# Altium PCB PCB1 (1).PcbDoc
Units mil, origin at the board's own origin, x right, y up, seen from the top; angles counter-clockwise.
Board outline 2720 x 1275 mil, 2 copper layers (Top Layer, Bottom Layer 1); 17 components, 10 nets, 71 pads, 6 vias.
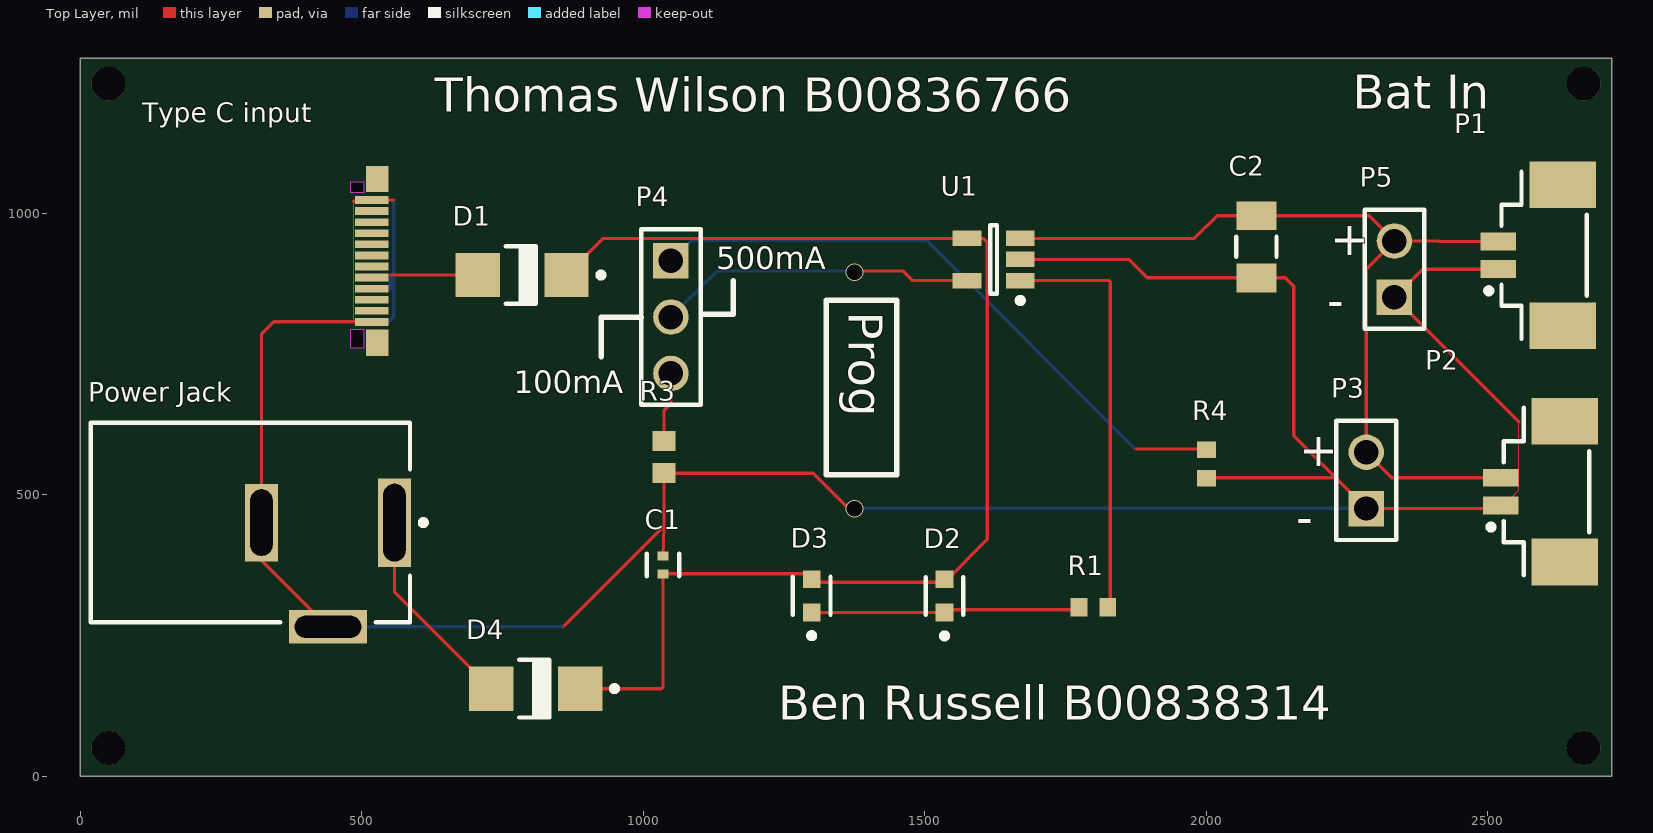
[diagram p0: Top Layer view]
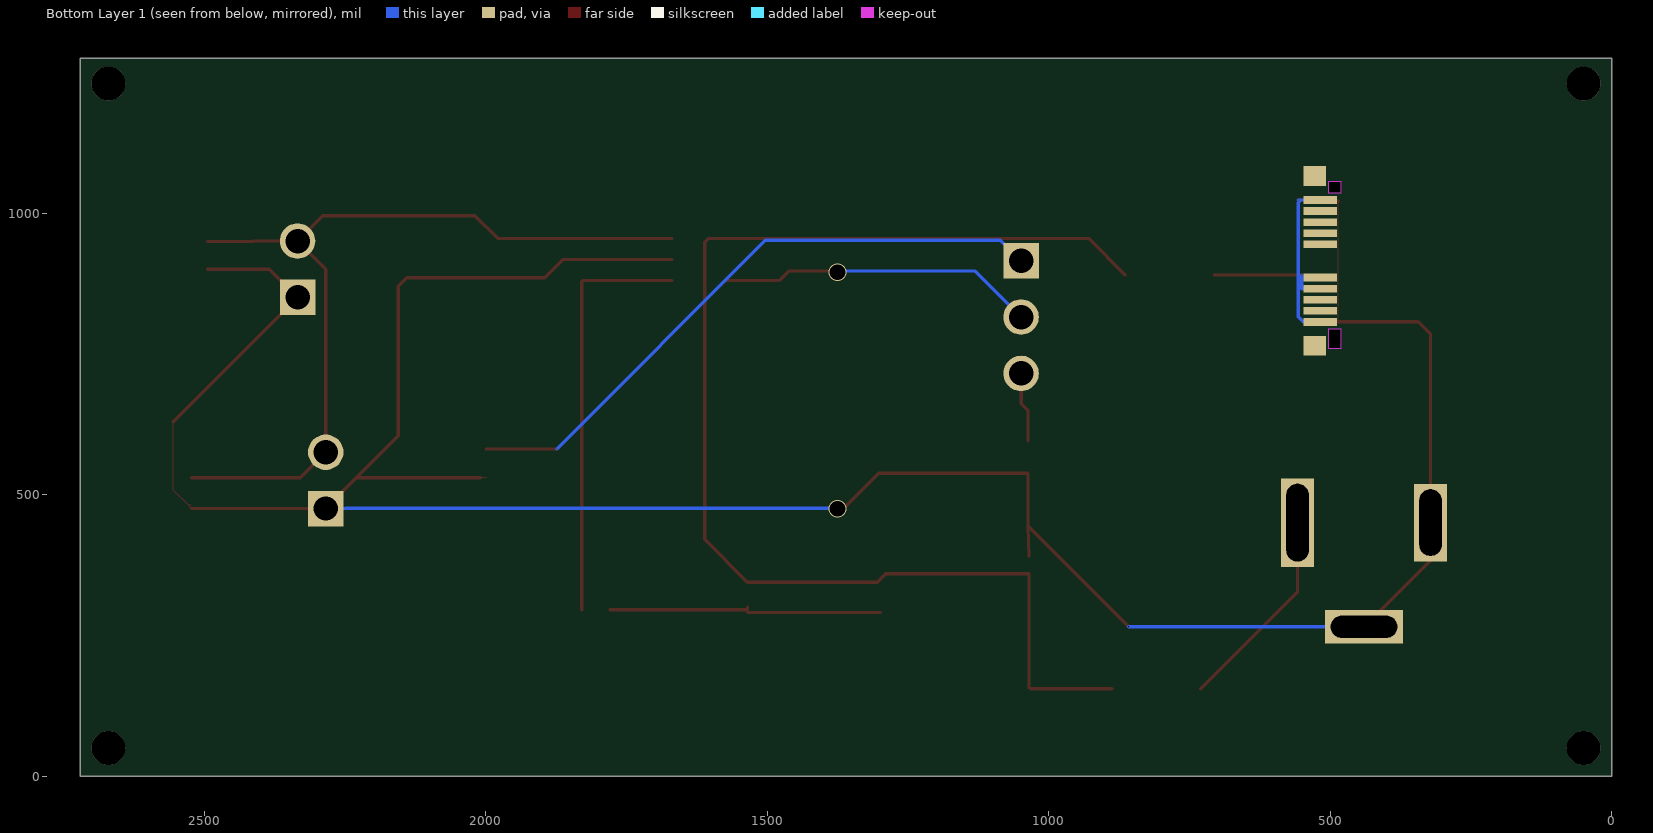
[diagram p1: Bottom Layer 1 view, seen from below]
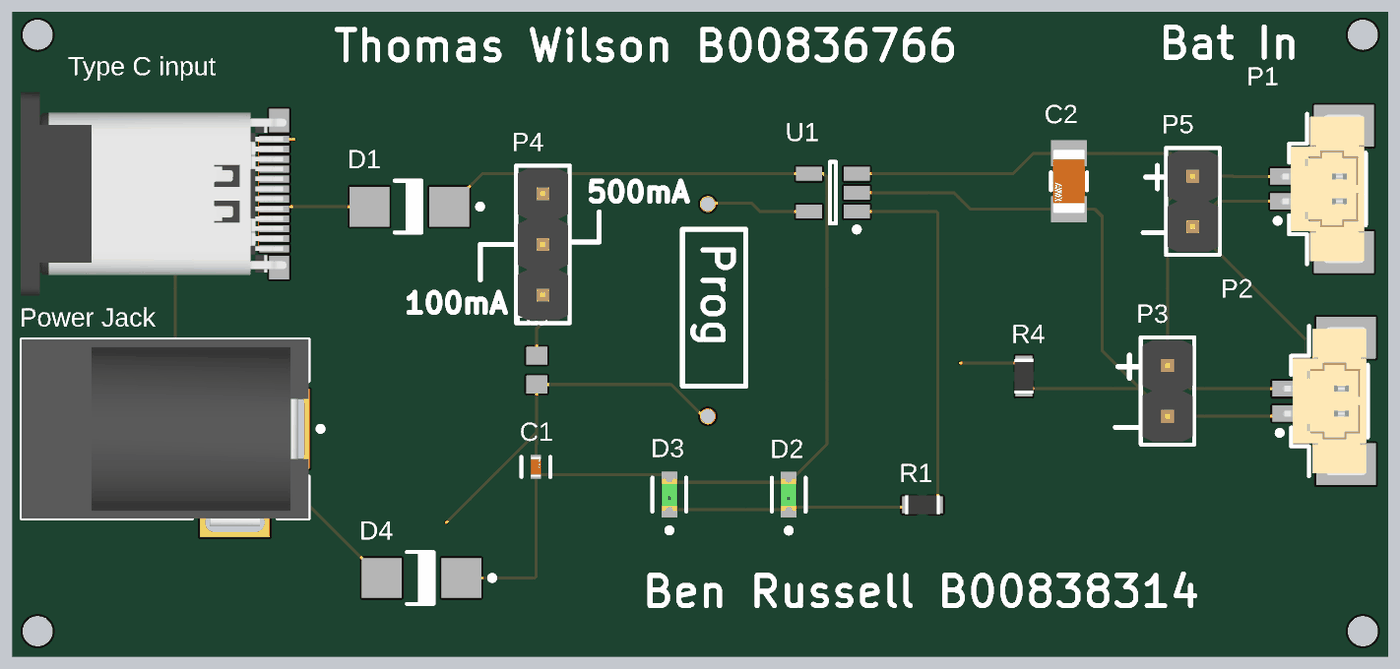
[diagram p2: 3D render of the assembled board from above, using the file's embedded part models]

## Layer stack, top to bottom
Top Solder: solder mask 1, SM-002, Dk 4
Top Layer: signal copper 1.4
Dielectric 1: dielectric 12.6, FR-4, Dk 4.8
Bottom Layer 1: signal copper 1.4
Bottom Solder: solder mask 1, SM-002, Dk 4

## Board outline
0,0 2720,0 2720,1275 0,1275

## Design rules (kind name [scope] priority, off if disabled: settings)
AssemblyTestPointUsage [All] p1 off:
AssemblyTestpoint [All] p1 off: testpointundercomponent=TRUE minsize=40 maxsize=100 preferedsize=60 minholesize=0 maxholesize=40 preferedholesize=32 testpointgrid=1 usegrid=TRUE gridtolerance=0.01 allowsidetop=TRUE allowsidebottom=TRUE
Clearance [All] p1: gap=0.25 ignorepadtopadclearanceinfootprint=FALSE
FabricationTestPointUsage [All] p1 off: valid=0 allowmultiple=FALSE
FabricationTestpoint [All] p1 off: side=3 testpointundercomponent=TRUE minsize=40 maxsize=100 preferedsize=60 minholesize=0 maxholesize=40 preferedholesize=32 testpointgrid=1 allowsidetop=TRUE allowsidebottom=TRUE usegrid=TRUE gridtolerance=0.01
PolygonConnect [All] p1: connectstyle=Relief reliefconductorwidth=10 reliefentries=4 polygonreliefangle="90 Angle" airgapwidth=10
RoutingVias [All] p1: holewidth=0.6 width=1 viastyle="Through Hole" minholewidth=0.6 minwidth=1 maxholewidth=0.6 maxwidth=1
SolderMaskExpansion [All] p1: expansion=4
Width Width_power [All] p1: maxlimit=5.91 minlimit=5.91 preferedwidth=5.91
Width [All] p2: maxlimit=5.91 minlimit=5.91 preferedwidth=5.91
26 further rules are at their usual default settings.

## Components (designator, comment, footprint, x,y, rotation, side; value= is the part's Value field where it differs from the comment)
C1 "C1005X5R1A475K050BC" FP-C1005-050-0_15-MFG 1035,375 r90 top
C2 "12063C475KAT2A" FP-1206-L_3_2_0_2-W_1_6_0-IPC_B 2089,940.15 r270 top
D1 "MBRA140T3G" ONSC-SMA-2-403D-02_V 785,890 r180 top
D2 "LTST-C190GKT" FP-LTST-C190GKT-MFG 1535,320 r90 top
D3 "LTST-C190GKT" FP-LTST-C190GKT-MFG 1299,320.3 r90 top
D4 "MBRA140T3G" ONSC-SMA-2-403D-02_V 809,155.3 r180 top
P1 "653102124022" 653102124022 2600,925 r90 top
P2 "653102124022" 653102124022 2604,505.3 r90 top
P3 "61300211121" 61300211121 2284,525.3 r90 top
P4 "61300311121" 61300311121 1049,815.3 r270 top
P5 "61300211121" 61300211121 2334,900.3 r90 top
"Power Jack" "PJ-002A" CUI-PJ-002A_V 440,450.3 r180 top (schematic designator "Power Jack1")
R1 "ERJ-3EKF3300V" RESC1608X55X30LL15T15 1799.41,300 r0 top
R3 "ERJ-3EKF2001V" RESC1608X55X30ML15T15 1036.68,566.76 r90 top
R4 "ERJ3EKF1002V" RESC1609X55X30LL15T15 2000,554.41 r90 top
"Type C input" "632712000011" 632712000011 250,915 r270 top (schematic designator J1)
U1 "MCP73831T-3ACI/OT" SOT-23-OT5_M 1622.24,917.6 r180 top

## Footprints (in the part's own frame and the unit in brackets; to place one, negate y for a bottom-side part, rotate by r counter-clockwise, add the part's x,y. Pads: shape width x height; smd on the part's side, far side on the other; paste and mask are expansions set on the pad)
61300211121 [mm] "Pin Header, pitch 2.54 mm, THT, Vertical, single row, 2p"
  rect 1.6x1.6 hole 1.1: 1(-1.27,0)
  round 1.6 hole 1.1: 2(1.27,0)
  silkscreen extent -2.69,-1.34 2.69,1.34, body extent -2.54,-1.27 2.54,1.27, height 8.57
61300311121 [mm] "Pin Header, pitch 2.54 mm, THT, Vertical, single row, 3p"
  rect 1.6x1.6 hole 1.1: 1(-2.54,0)
  round 1.6 hole 1.1: 2(0,0) 3(2.54,0)
  silkscreen extent -3.96,-1.34 3.96,1.34, body extent -3.81,-1.27 3.81,1.27, height 8.57
632712000011 [mm] "USB 3.1 Type C Plug Horizontal SMT"
  rect 0.35x1.5 smd: A1(2.75,6.8) A2(2.25,6.8) A3(1.75,6.8) A4(1.25,6.8) A5(0.75,6.8) A6(0.25,6.8) A7(-0.25,6.8) A8(-0.75,6.8) A9(-1.25,6.8) A10(-1.75,6.8) A11(-2.25,6.8) A12(-2.75,6.8)
  rect 0.35x1.5 smd far side: B1(-2.75,6.8) B2(-2.25,6.8) B3(-1.75,6.8) B4(-1.25,6.8) B5(-0.75,6.8) B8(0.75,6.8) B9(1.25,6.8) B10(1.75,6.8) B11(2.25,6.8) B12(2.75,6.8)
  rect 0.9x1 smd far side: Shell(-3.825,7.05) Shell(3.825,7.05)
  rect 1.18x1 smd: Shell(-3.69,7.05) Shell(3.69,7.05)
  Keep-Out Layer board cut-out: -3.58,5.85 -3.58,6.45 -3.08,6.45 -3.08,5.85
  Keep-Out Layer board cut-out: 3.075,5.85 3.075,6.45 3.945,6.45 3.945,5.85
  body extent -5.13,-5.92 5.12,7.48, height 1.74
653102124022 [mm] "1.25mm SMT Male Vertical Shrouded Header, 2p"
  rect 0.81x1.6 smd: 1(-0.625,2.07) 2(0.625,2.07)
  rect 2.1x3 smd: MP1(-3.175,-0.83) MP2(3.175,-0.83)
  silkscreen extent -3.77,-1.93 3.77,2.62, body extent -3.72,-1.85 3.72,2.36, height 4.74
CUI-PJ-002A_V [mm] "THD, 3-Leads, Body 14.4x9mm, Height 11mm"
  rect 1.5x4 hole 1 slot 3.5 at 90 deg: 1(-3,0)
  rect 1.5x3.5 hole 1 slot 3 at 90 deg: 2(3,0)
  rect 3.5x1.5 hole 1 slot 3 at 0 deg: 3(0,4.7)
  silkscreen extent -4.43,-4.5 10.7,4.5, body extent -3.7,-4.5 10.7,4.9, height 11
FP-1206-L_3_2_0_2-W_1_6_0-IPC_B [mil]
  rect 51.36x71.11 smd paste+0 mask+0: 1(-55.15,0) 2(55.15,0)
  silkscreen extent -18,-36 18,36, body extent -91,-45 91,45, height 10
FP-C1005-050-0_15-MFG [mm]
  rect 0.4x0.5 smd paste+0 mask+0: 1(-0.4,0) 2(0.4,0)
  silkscreen extent -0.5,-0.72 0.5,0.73, body extent -0.7,-0.43 0.7,0.43, height 0.25
FP-LTST-C190GKT-MFG [mm]
  rect 0.8x0.8 smd paste+0 mask+0: 1(-0.75,0) 2(0.75,0)
  silkscreen extent -1.92,-0.85 0.85,0.85, body extent -1.25,-0.55 1.25,0.55, height 0.25
ONSC-SMA-2-403D-02_V [mm] "Molded, 2-Leads, Body 4.57x2.92mm"
  rect 2x2 smd: 1(-2,0) 2(2,0)
  silkscreen extent -3.67,-1.3 0.74,1.3, body extent -2.16,-1.3 2.16,1.3, height 2.2
RESC1608X55X30LL15T15 [mm] "Chip Resistor, 2-Leads, Body 1.75x0.95mm, IPC High Density"
  rect 0.75x0.85 smd: 1(-0.65,0) 2(0.65,0)
  body extent -0.87,-0.48 0.87,0.48, height 0.55
RESC1608X55X30ML15T15 [mm] "Chip Resistor, 2-Leads, Body 1.60x0.80mm, IPC Low Density"
  rect 0.9x1.05 smd: 1(-0.725,0) 2(0.725,0)
  body extent -0.87,-0.48 0.87,0.48, height 0.55
RESC1609X55X30LL15T15 [mm] "Chip Resistor, 2-Leads, Body 1.75x0.95mm, IPC High Density"
  rect 0.75x0.85 smd: 1(-0.65,0) 2(0.65,0)
  body extent -0.87,-0.48 0.87,0.48, height 0.55
SOT-23-OT5_M [mm] "SOT23, 5-Leads, Body 2.9x1.7mm, Pitch 0.95mm, Lead Span 2.8mm, IPC Low Density"
  rect 1.3x0.7 smd: 1(-1.2,0.95) 2(-1.2,0) 3(-1.2,-0.95) 4(1.2,-0.95) 5(1.2,0.95)
  silkscreen extent -1.33,-1.55 0.15,1.97, body extent -0.9,-1.55 0.9,1.55, height 1.45

## Part data
C1: library part CMP-2000-05997-2, "CAP CER 4.7UF 10V X5R 0402", Capacitance=4.7uF, Case/Package=0402, Case Code (Metric)=1005, Dielectric=X5R, Dielectric Material=Ceramic, Max Operating Temperature=85°C, Min Operating Temperature=-55°C, Package Quantity=10000, Tolerance=10%, Voltage Rating=10V, Case Code (Imperial)=0402, Lead Free="Lead Free", Length=0.039inch, Mount="Surface Mount", Packaging="Cut Tape", REACH SVHC="No SVHC", RoHS Compliant=Yes, Series=C, Thickness=0.022inch, Voltage Rating (DC)=10V, Width=0.02inch
C2: library part CMP-04427-020849-1, "General Purpose Ceramic Capacitor, 1206, 4.7uF, 10%, X7R, 15%, 25V", Capacitance=4.7uF, Case/Package=1206, Case Code (Metric)=3216, Dielectric=X7R, Max Operating Temperature=125°C, Min Operating Temperature=-55°C, Package Quantity=1, Tolerance=10%, Voltage=25V, Case Code (Imperial)=1206, Construction=Flat, Contact Plating=Tin, Depth=1.6mm, Height=1.78mm, Lead Free="Lead Free", Length=3.2mm, Mount="Surface Mount", Number of Pins=2, Packaging="Tape and Reel", Radiation Hardening=No, REACH SVHC="No SVHC", RoHS Compliant=Yes, Series=-, Termination=SMD/SMT, Thickness=0.07inch, Voltage Rating=25V, Voltage Rating (DC)=25V, Width=0.063inch
D1 D4: library part CMP-1055-00320-1, "Schottky Power Rectifier, 2-Pin SMA, Pb-Free, Tape and Reel", Manufacturer="On Semiconductor", ComponentLink1Description="Manufacturer URL", ComponentLink1URL=http://www.onsemi.com/, ComponentLink2Description=Datasheet, ComponentLink2URL=http://www.onsemi.cn/pub_link/Collateral/MBRA140T3-D.PDF, ComponentLink3Description="Package Specification", ComponentLink3URL=http://www.onsemi.com/pub_link/Collateral/403D-02.PDF, Configuration=Single, DatasheetVersion="Rev. 10", IFSM Max (A)=30, Mounting Technology="Surface Mount", PackageDescription="2-Pin Small Molded Package, J-Bend Lead, Body 2.605 x 4.315 mm", PackageReference=SMA-2-403D-02, PackageVersion="Rev. G, 07/2012", Packing="Tape and Reel", PartNumber=MBRA140T3G, RoHS=TRUE
D2 D3: library part CMP-22017-000005-2, "LED GREEN CLEAR CHIP SMD", Case/Package=0603, Case Code (Metric)=1608, Color=Green, Forward Current=30mA, Forward Voltage=2.1V, Lens Color=Colorless, Max Operating Temperature=85°C, Min Operating Temperature=-55°C, Package Quantity=1, Power Dissipation=100mW, Reverse Voltage=5V, Test Current=10mA, Voltage=2V, Case Code (Imperial)=0603, Depth=0.8mm, Dominant Wavelength=569nm, Height=0.8mm, Illumination Color=Green, Lead Free="Lead Free", Length=1.6mm, Lens Style=Clear, Lens Transparency=Clear, Luminous Intensity=6mcd, Mount="Surface Mount", Number of Elements=1, Number of LEDs=1, Number of Pins=2, Packaging="Tape and Reel", Power Rating=100mW, Radiation Hardening=No, Viewing Angle=130°, Wavelength=565nm, Width=0.8mm
P1 P2: library part CMP-1502-00757-1, "Male Shrouded Header WR-WTB, SMT, Vertical, pitch 1.25 mm, 1 x 2 position", Contact Resistance=20mOhm, Manufacturer="Wurth Elektronik", Operating Temperature=-40to85degC, Working Voltage=125VAC, Datasheet URL=https://katalog.we-online.de/em/datasheet/6531xx124022.pdf, Gender=Male, Manufacturer URL=http://www.we-online.de, Mounting Technology=SMT, Orientation=Vertical, Package Reference=653102124022, Packaging=TapeandReel, Part Number=653102124022, Pitch=1.25mm, Position=1x2, Publisher=WurthElektronik
P3 P5: library part CMP-1712-00002-4, "THT Vertical Pin Header WR-PHD, Pitch 2.54 mm, Single Row, 2 pins", Contact Resistance=20mOhm, Manufacturer="Wurth Elektronik", Operating Temperature=-40to105degC, Rated Current=3A, Withstanding Voltage=500VAC, Working Voltage=250VAC, Datasheet URL=https://katalog.we-online.de/em/datasheet/6130xx11121.pdf, Gender=Male, Manufacturer URL=http://www.we-online.de, Mounting Technology=THT, Orientation=Vertical, Package Reference=61300211121, Packaging=Bag, Part Number=61300211121, Pin Number=2, Pitch=2.54mm, Publisher=WurthElektronik, Row Number=Single
P4: library part CMP-1502-01062-1, "THT Vertical Pin Header WR-PHD, Pitch 2.54 mm, Single Row, 3 pins", Contact Resistance=20mOhm, Manufacturer="Wurth Elektronik", Operating Temperature=-40to105degC, Rated Current=3A, Withstanding Voltage=500VAC, Working Voltage=250VAC, Datasheet URL=https://katalog.we-online.de/em/datasheet/6130xx11121.pdf, Gender=Male, Manufacturer URL=http://www.we-online.de, Mounting Technology=THT, Orientation=Vertical, Package Reference=61300311121, Packaging=Bag, Part Number=61300311121, Pin Number=3, Pitch=2.54mm, Publisher=WurthElektronik, Row Number=Single
"Power Jack": library part CMP-2000-06895-1, "Through Hole Right Angle DC Power Jack, 2.5 A, 2 mm Center Pin, 3 Position, -25 to 85 degC, RoHS, Bulk", Current Rating=2.5A, Flammability Rating=UL94V-0, Insulation Resistance=50MOhms, Manufacturer=CUIInc., Operating Temperature Range=-25Cto+85C, Package Description="3-Pin Through Hole Device, Body 14.4 x 9 mm, Height 11 mm", Voltage Rating=24V, Brand=CUI, Connector Type=DCPowerJack, Contact Gender=Male, Contact Material=Copper, Contact Plating=Nickel, Datasheet URL=http://www.cui.com/product/resource/pj-002a.pdf, Datasheet Version="Rev. 1.03, 04/2016", Factory Pack Quantity=500, Housing Material=PolybutyleneTerephthalate(PBT), Inside Contact Diameter=2mm, Manufacturer URL=http://www.cui.com/, Mounting Angle=Right, Mounting Style=ThroughHole, Mounting Technology=ThroughHole, Outside Contact Diameter=6.5mm, Package Reference=PJ-002A, Product=Jacks, Product Category=DCPowerConnectors, RoHS=True, Termination Style=ThroughHole
R1: library part CMP-2000-00435-2, "Chip Resistor, 330 Ohm, +/- 1%, 0.1 W, -55 to 155 degC, 0603 (1608 Metric), RoHS, Tape and Reel", Current Rating="500 mA", Max Operating Temperature="85 degC", Min Operating Temperature="-25 degC", Package Quantity=1500, Voltage Rating="10 V", ComponentLink1Description="Manufacturer URL", ComponentLink1URL=http://www.panasonic.com/, ComponentLink2Description=Datasheet, ComponentLink2URL=http://industrial.panasonic.com/cdbs/www-data/pdf/RDA0000/AOA0000C86.pdf, Contact Finish=Gold, Contact Material=Copper, Contact Plating=Gold, DatasheetVersion=Apr-15, Gender=Male, Height="1.45 mm", Lead Pitch="1.1 mm", Length="13.7 mm", Mating Cycles=10000, Mount="Surface Mount", PackageDescription="2-Pin Surface Mount Device, Body 1.6 x 0.85 mm", PackageReference=0603, Packaging="Tape and Reel", Pins=8, REACH SVHC="No SVHC", RoHSCompliant=true, Width="1.45 mm"
R3: library part CMP-2000-00317-1, Manufacturer=Panasonic, Part Number=ERJ-3EKF2001V
R4: library part CMP-1012-00623-3, "Chip Resistor, 10 KOhm, +/- 1%, 0.1 W, -55 to 155 degC, 0603 (1608 Metric), RoHS, Tape and Reel", Case\/Package=0603, Case Code (Metric)=1608, Manufacturer=Panasonic, Max Operating Temperature=155degC, Max Power Dissipation=100mW, Min Operating Temperature=-55degC, Package Description="2-Pin Surface Mount Device, Body 1.6 x 0.85 mm", Package Quantity=1, Package Reference=603, Resistance=10KOhm, Temperature Coefficient=100ppm\/degreesC, Tolerance=1%, Voltage Rating=75V, Case Code (Imperial)=0603, Composition=ThickFilm, Contact Plating=Tin, Datasheet URL=https://industrial.panasonic.com/cdbs/www-data/pdf/RDA0000/AOA0000C304.pdf, Datasheet Version=02/2017, Depth=0.8mm, Height=0.45mm, Lead Free=LeadFree, Length=1.6mm, Manufacturer URL=http://www.panasonic.com/, Military Standard=Not, Mount=SurfaceMount, Mounting Technology=SurfaceMount, Number of Pins=2, Number of Terminations=2, Packaging=TapeandReel, Power Rating=100mW, Radiation Hardening=No, REACH SVHC=NoSVHC, RoHSCompliant=true, Termination=SMD/SMT, Voltage Rating (DC)=75V, Width=0.031inch
"Type C input": library part CMP-1502-03215-1, "USB 3.1 Type C Plug WR-COM, Horizontal, SMT", Contact Resistance=30mOhm, Manufacturer="Wurth Elektronik", Operating Temperature=-25to105degC, Rated Current=5A, Working Voltage=20VDC, Connector Type=USB3.1TypeC, Datasheet URL=https://katalog.we-online.de/em/datasheet/632712000011.pdf, Gender=Plug, Manufacturer URL=http://www.we-online.de, Mounting Technology=SMT, Orientation=Horizontal, Package Reference=632712000011, Packaging=TapeandReel, Part Number=632712000011, Publisher=WurthElektronik
U1: library part CMP-0133-00145-1, "Miniature Single-Cell, Fully Integrated Li-Ion, Li-Polymer Charge Management Controller, 4.35V, 5-Pin SOT-23, Industrial Temperature, Tape and Reel", Code_IPC=SOT23-5, DatasheetVersion="revE, Sep-2008", PackageDescription="5-Lead Plastic Small Outline Transistor (OT) [SOT-23]", PackageReference=SOT-23-OT5, PackageVersion="revBB, Aug-2009"

## Free pads (board coordinates)
  round 60 hole 60 unplated: 6(50,50) 6(50,1230) 6(2670,50) 6(2670,1230)

## Via types
v1: diameter 1, hole 0.6, Top Layer to Bottom Layer 1, 4 vias
v2: diameter 31.5, hole 28, Top Layer to Bottom Layer 1, 2 vias

## Nets (pads, with @x,y where several pads share a name; then routed paths per layer and width w, separated by ;. In a path a pad name is that pad's centre, name@x,y a point inside that pad or via, vN(x,y) a via of type N, cw(c..) or ccw(c..) an arc to the next point about the centre after c; other vN are vias at no path point)
GND: "Power Jack.2" "Power Jack.3" "Type C input.A1" "Type C input.A12" "Type C input.B1" "Type C input.B12" C1.2 C2.2 P1.1 P2.1 P3.1 P5.1 R3.1 R4.1 U1.2 | length 5532.8
  Top Layer w0.5: 321.89,383.37 321.89,450.3 ; 486,1021.27 486,808.73 488,806.73 517.72,806.73 ; R4.1@1999,529.71 R4.1@2009.71,529.71 ; P2.1@2522.3,475.3 2525.1,478.1 P2.1@2527.69,480.69 ; P2.1 P2.1@2527.69,480.69 ; 2555,629.3 2555,508 P2.1@2527.69,480.69
  Top Layer w5.91: 321.89,383.37 440,265.26 ; 321.89,450.3 321.89,784.62 344,806.73 488,806.73 ; 486,1021.27 517.72,1023.27 v1(557,1023.27) ; v1(858.26,265.26) 1036.68,443.68 ; C1.2 1036.68,443.68 ; v2@1366.68,473.49 1301.95,538.21 R3.1 1036.68,443.68 ; U1.2 1862,917.6 1894.6,885 C2.2 2140,885 2155,870 2155,675 2155,604.3 2229.59,529.71 ; R4.1@2009.71,529.71 2229.59,529.71 ; P1.1@2493.5,900.39 2384.09,900.39 P5.1 2555,629.3 ; P2.1@2522.3,475.3 P3.1 2229.59,529.71
  Bottom Layer 1 w5.91: 440,265.26 v1(858.26,265.26) ; 517.72,806.73 547.73,806.73 557,816 557,1018.27 552,1023.27 ; 517.72,1023.27 552,1023.27 ; v1(557,1023.27) 552,1023.27 ; v2@1366.68,473.49 1369.19,476 2249,476 2249.7,475.3 P3.1
  other v2: 1375,475
NetC1_1: C1.1 D1.1 D2.2 D3.2 D4.1 U1.4 | length 2267.8
  Top Layer w5.91: D1.1 928.74,955 U1.4 1604,955 1611,948 1611,420.53 1535,344.53 1304.3,344.53 D3.2 1289.58,359.25 C1.1 1035,158 1032.3,155.3 D4.1
NetC2_1: C2.1 P1.2 P2.2 P3.2 P5.2 U1.3 | length 1512.7
  Top Layer w0.25: 2413,950.3 2413.69,949.61
  Top Layer w5.91: U1.3 1978.7,955 2019,995.3 C2.1 2289,995.3 P5.2 ; 2413,950.3 P5.2 ; 2413.69,949.61 P1.2@2493.5,949.61 ; P2.2 2329.39,529.91 P3.2 2284,900.3 P5.2
NetD2_1: D2.1 D3.1 R1.1 | length 484.5
  Top Layer w5.91: D3.1 1299.3,290.47 D2.1 ; D2.1@1535,300.3 1535,295.3 R1.1@1778.41,295.3
NetP4_1: P4.1 R4.2 | length 1118.9
  Top Layer w5.91: v1(1874.11,580.89) R4.2@1999,580.89
  Bottom Layer 1 w5.91: P4.1 1085.7,952 1503,952 v1(1874.11,580.89)
NetP4_2: P4.2 U1.5 | length 566.9
  Top Layer w5.91: v2@1366.68,897.11 1462,897.11 1478.92,880.2 U1.5
  Bottom Layer 1 w5.91: P4.2 1130.81,897.11 v2@1366.68,897.11
  other v2: 1375,895
NetP4_3: P4.3 R3.2 | length 125.1
  Top Layer w5.91: R3.2 1036.68,649 1049,661.32 P4.3
NetR1_2: R1.2 U1.1 | length 743.7
  Top Layer w0.25: 1827.39,880.2 1829.59,878
  Top Layer w5.91: U1.1 1827.39,880.2 ; R1.2@1829.59,295.3 1829.59,878
"VIN 1": "Type C input.B9" D1.2 | length 212.8
  Top Layer w5.91: v1(550.59,890) D1.2
  Bottom Layer 1 w5.91: 517.72,865.79 550.59,865.79 v1(550.59,890)
"VIN 2": "Power Jack.1" D4.2 | length 366.3
  Top Layer w5.91: 558.11,450.3 558.11,327.45 D4.2
pads on no net: "Type C input.A2" "Type C input.A3" "Type C input.A4" "Type C input.A5" "Type C input.A6" "Type C input.A7" "Type C input.A8" "Type C input.A9" "Type C input.A10" "Type C input.A11" "Type C input.B2" "Type C input.B3" "Type C input.B4" "Type C input.B5" "Type C input.B8" "Type C input.B10" "Type C input.B11" "Type C input.Shell" P1.MP1 P1.MP2 P2.MP1 P2.MP2

## Silkscreen, mask and mechanical layers (free items; w line width, h text height)
Top Overlay:
  lines w10: 925.3,745.3 925.3,815.3 996.05,815.3 ; 1106.65,820 1160,820 1159.7,879.7 ; 1325,535 1340,535 1450,535 1450,845 1325,845 1325,535
  text "Bat In" at 2260,1185 h60
  text "Thomas Wilson B00836766" at 630,1180 h60
  text "+" at 2220,925 h60
  text "500mA" at 1130,900 h40
  text "Prog" at 1365,825 h60 r270
  text "-" at 2215,815 h60
  text "100mA" at 770,680 h40
  text "+" at 2165,550 h60
  text "-" at 2160,430 h60
  text "Ben Russell B00838314" at 1240,100 h60